# EAGLE board kinesisBLE V1 (EAGLE 9.1.3)
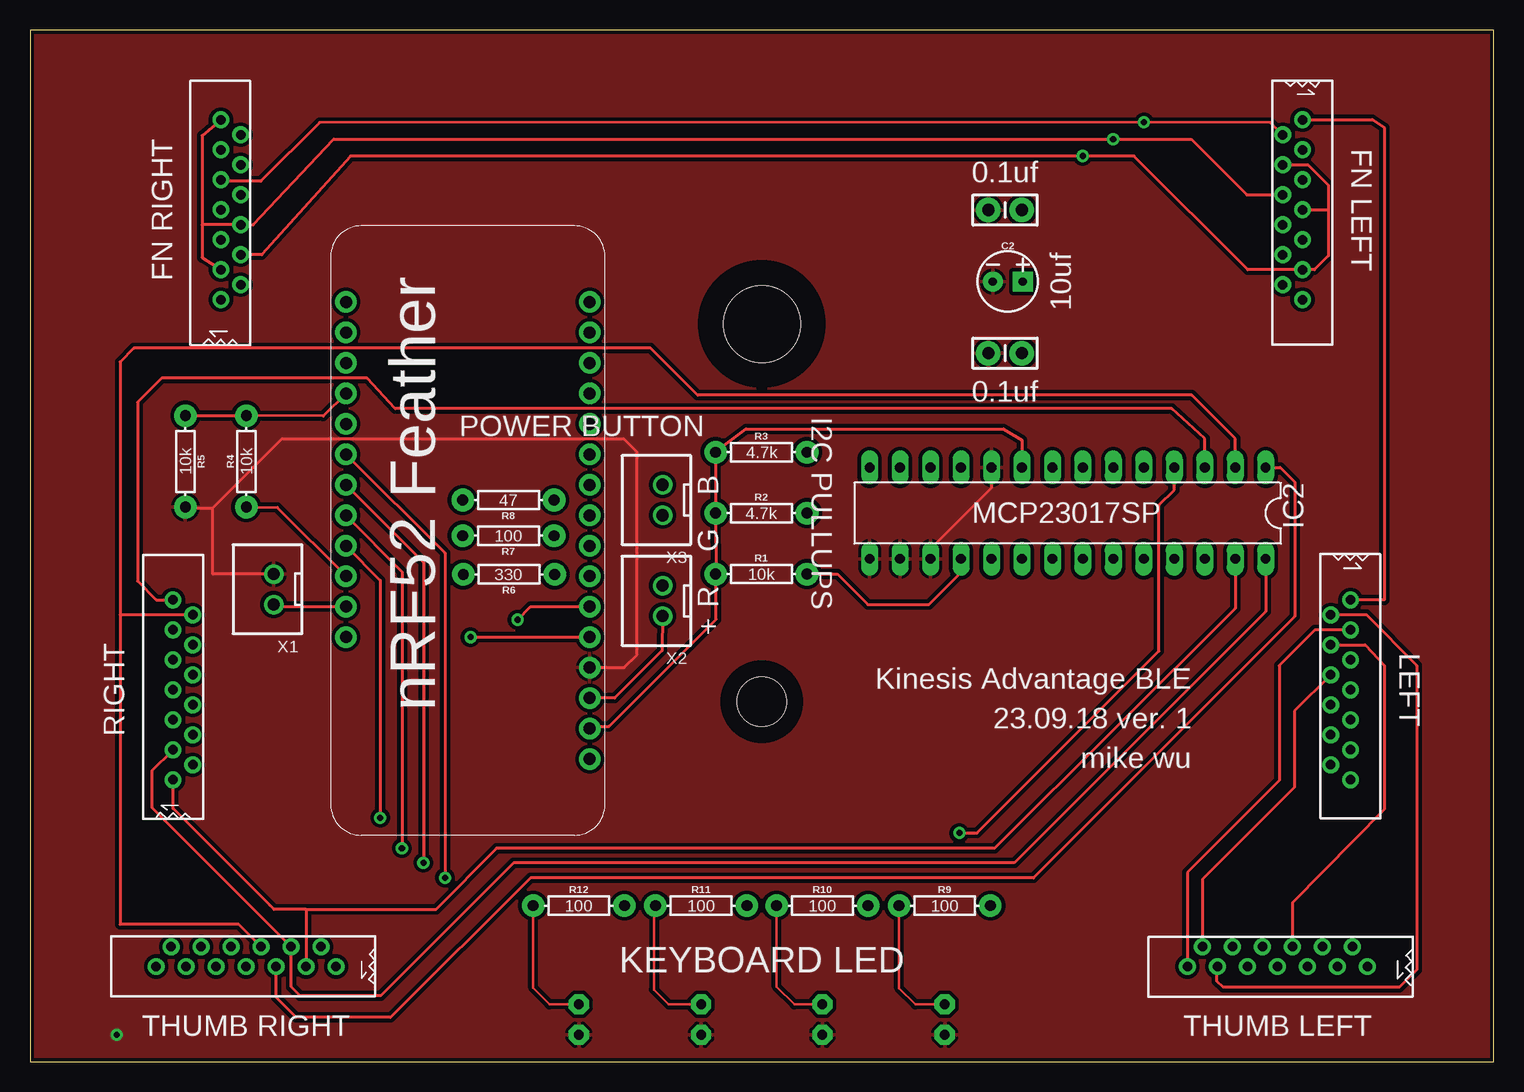
[diagram p0: board, top side]
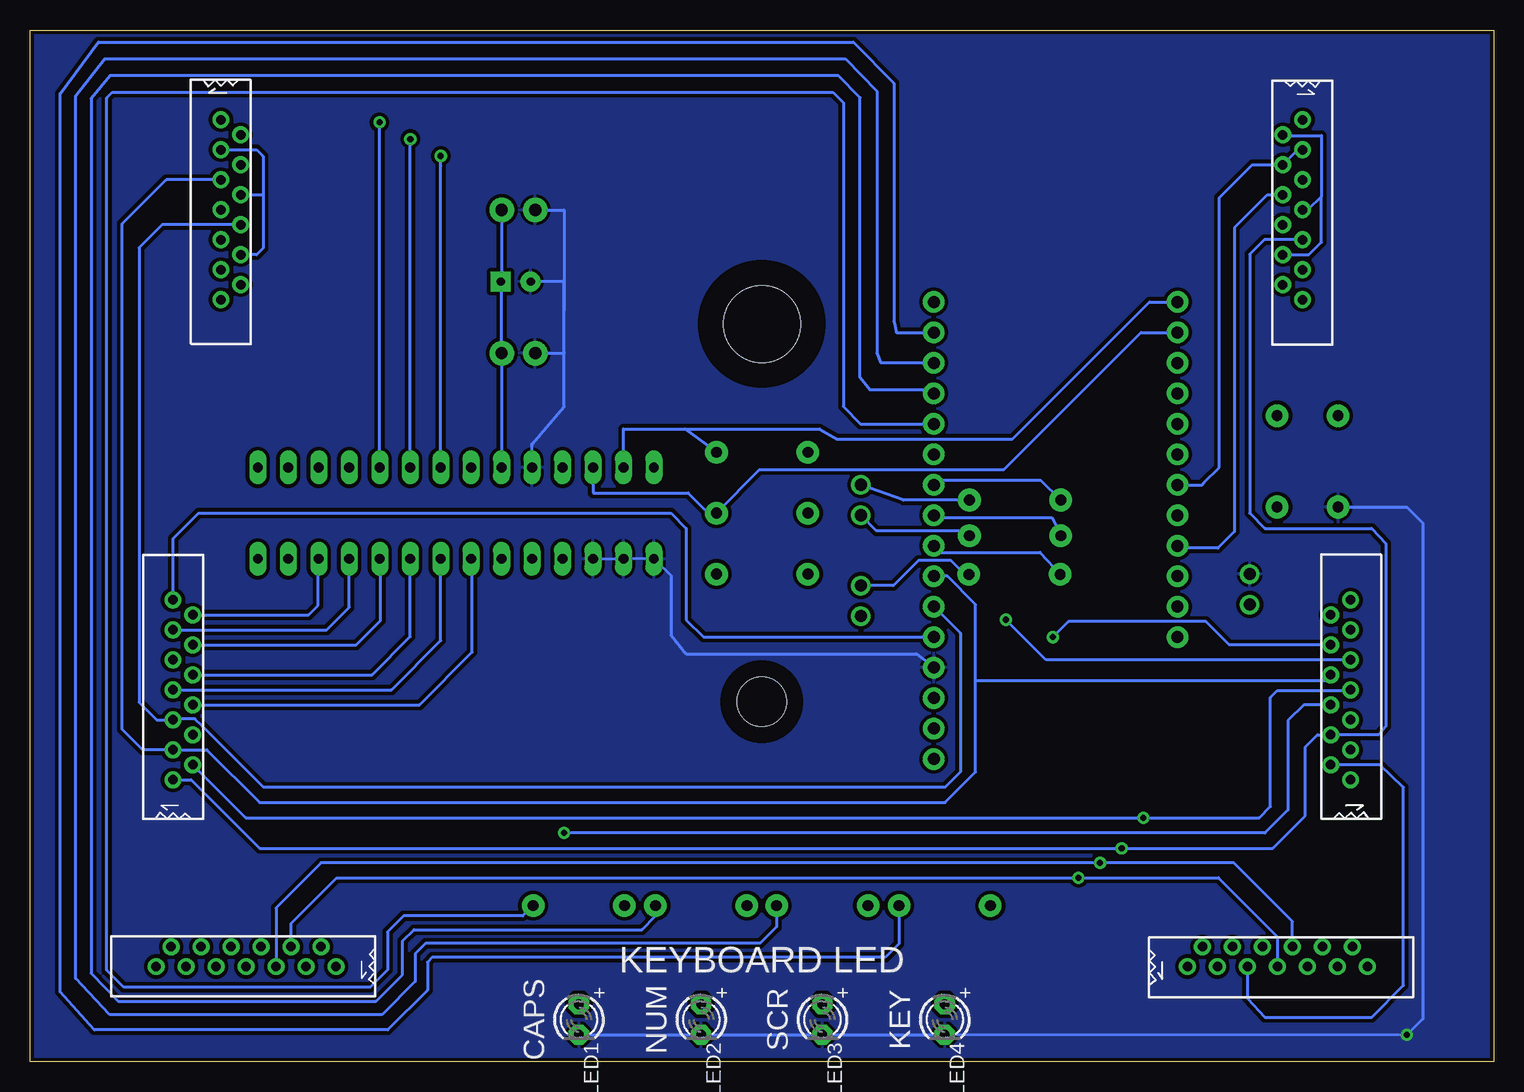
[diagram p1: board, bottom side, seen from below]

Size 122 x 86 mm. Coordinates in mm from the lower left corner, seen from the top.
Outline: 0,0 122,0 122,86 0,86 0,0
Copper layers (1*16): Top 0.035mm / dielectric 1.5mm / Bottom 0.035mm
Design rules "SparkFun": minimum track width 8mil, minimum drill 20mil, track to track 8mil, track to pad 8mil, pad to pad 8mil, via to via 8mil, smd to smd 8mil, copper to edge 10mil, drill to drill 8mil, minimum pad ring 12mil, minimum via ring 10mil, stop-mask expansion 4mil, vias tented up to drill 25mil, thermal gap 10mil
Holes 6.4 mm at 61,61.5
Holes 4.1 mm at 61,30
tKeepout: area 56,56.5 to 66,66.5; area 58.4,27.4 to 63.6,32.6
bKeepout: area 56,56.5 to 66,66.5; area 58.4,27.4 to 63.6,32.6
tRestrict: area 56,56.5 to 66,66.5; area 58.4,27.4 to 63.6,32.6
bRestrict: area 56,56.5 to 66,66.5; area 58.4,27.4 to 63.6,32.6
vRestrict: area 56,56.5 to 66,66.5; area 58.4,27.4 to 63.6,32.6

## Footprints (pad centres in the part's own frame; a part is rotated, then mirrored left to right if it is on the bottom)
CAP-PTH-SMALL-KIT = drill 1.016 pad 2.032: 1 -1.397,0; 2 1.397,0
CPOL-RADIAL-2.5MM-5MM = drill 0.7 pad 1.651 square: 1 1.25,0 | drill 0.7 pad 1.651: 2 -1.25,0
DIL28-3 = drill 0.813 long: 1 -16.51,-3.81; 2 -13.97,-3.81; 3 -11.43,-3.81; 4 -8.89,-3.81; 5 -6.35,-3.81; 6 -3.81,-3.81; 7 -1.27,-3.81; 8 1.27,-3.81; 9 3.81,-3.81; 10 6.35,-3.81; 11 8.89,-3.81; 12 11.43,-3.81; 13 13.97,-3.81; 14 16.51,-3.81; 15 16.51,3.81; 16 13.97,3.81; 17 11.43,3.81; 18 8.89,3.81; 19 6.35,3.81; 20 3.81,3.81; 21 1.27,3.81; 22 -1.27,3.81; 23 -3.81,3.81; 24 -6.35,3.81; 25 -8.89,3.81; 26 -11.43,3.81; 27 -13.97,3.81; 28 -16.51,3.81
LED3MM = drill 0.813 pad 1.676 octagon: A -1.27,0; K 1.27,0
AXIAL-0.3 = drill 0.9 pad 1.88: P$1 -3.81,0; P$2 3.81,0
NRF52FEATHER = drill 1 pad 1.778: 1 -17.78,-10.16; 2 -15.24,-10.16; 3 -12.7,-10.16; 4 -10.16,-10.16; 5 -7.62,-10.16; 6 -5.08,-10.16; 7 -2.54,-10.16; 8 0,-10.16; 9 2.54,-10.16; 10 5.08,-10.16; 11 7.62,-10.16; 12 10.16,-10.16; 13 12.7,-10.16; 14 15.24,-10.16; 15 17.78,-10.16; 16 20.32,-10.16; 17 20.32,10.16; 18 17.78,10.16; 19 15.24,10.16; 20 12.7,10.16; 21 10.16,10.16; 22 7.62,10.16; 23 5.08,10.16; 24 2.54,10.16; 25 0,10.16; 26 -2.54,10.16; 27 -5.08,10.16; 28 -7.62,10.16
TOPLINKS_STAPELBERG = drill 0.8: P$1 -0.08,7.51; P$2 1.57,6.26; P$3 -0.08,5.01; P$4 1.57,3.76; P$5 -0.08,2.51; P$6 1.57,1.26; P$7 -0.08,0.01; P$8 1.57,-1.24; P$9 -0.08,-2.49; P$10 1.57,-3.74; P$11 -0.08,-4.99; P$12 1.57,-6.24; P$13 -0.08,-7.49
JST-XH-02-PACKAGE-ROUND-PAD = drill 1.016: 1 -1.27,0; 2 1.27,0

## Placement (x,y rotation side)
C1  0.1uF  [CAP-PTH-SMALL-KIT]  81.28,59.05 0 top
C2  10uF  [CPOL-RADIAL-2.5MM-5MM]  81.51,65.02 0 top
C3  0.1uF  [CAP-PTH-SMALL-KIT]  81.28,70.99 0 top
IC2  MCP23017SP  [DIL28-3]  86.5,45.72 180 top
LED1  [LED3MM]  76.25,3.5 270 bottom
LED2  [LED3MM]  66.05,3.5 270 bottom
LED3  [LED3MM]  55.95,3.5 270 bottom
LED4  [LED3MM]  45.75,3.5 270 bottom
R1  10k  [AXIAL-0.3]  60.96,40.64 0 top
R2  4.7k  [AXIAL-0.3]  60.96,45.72 0 top
R3  4.7k  [AXIAL-0.3]  60.96,50.8 0 top
R4  10k  [AXIAL-0.3]  18.03,50.04 90 top
R5  10k  [AXIAL-0.3]  12.95,50.04 270 top
R6  330  [AXIAL-0.3]  39.93,40.61 180 top
R7  100  [AXIAL-0.3]  39.88,43.84 180 top
R8  100  [AXIAL-0.3]  39.88,46.81 180 top
R9  330  [AXIAL-0.3]  76.25,13 0 top
R10  330  [AXIAL-0.3]  66.05,13 0 top
R11  330  [AXIAL-0.3]  55.95,13 0 top
R12  330  [AXIAL-0.3]  45.75,13 0 top
U$1  NRF52FEATHER  [NRF52FEATHER]  36.5,43 90 top
U$2  TOPLINKS_STAPELBERG  [TOPLINKS_STAPELBERG]  16,71 0 top
U$3  TOPLINKS_STAPELBERG  [TOPLINKS_STAPELBERG]  106,71 0 bottom
U$4  TOPLINKS_STAPELBERG  [TOPLINKS_STAPELBERG]  12,31 180 bottom
U$5  TOPLINKS_STAPELBERG  [TOPLINKS_STAPELBERG]  110,31 180 top
U$6  TOPLINKS_STAPELBERG  [TOPLINKS_STAPELBERG]  104,8 90 top
U$7  TOPLINKS_STAPELBERG  [TOPLINKS_STAPELBERG]  18,8 90 bottom
X1  JST-XH-02-PIN-ROUND-PAD  [JST-XH-02-PACKAGE-ROUND-PAD]  20.32,39.37 90 top
X2  JST-XH-02-PIN-ROUND-PAD  [JST-XH-02-PACKAGE-ROUND-PAD]  52.73,38.4 90 top
X3  JST-XH-02-PIN-ROUND-PAD  [JST-XH-02-PACKAGE-ROUND-PAD]  52.73,46.81 90 top

## Library data of the parts
C1 C3 = SparkFun-Capacitors; PROD_ID: CAP-08370
C2 = SparkFun-Capacitors; PROD_ID: CAP-08440
IC2 LED1-LED4 = adafruit
R1-R5 = SparkFun-Resistors; PROD_ID: RES-09435
R6 R9-R12 = SparkFun-Resistors; PROD_ID: RES-8371
R7 R8 = SparkFun-Resistors; PROD_ID: RES-12181
U$1 = mike
U$2-U$7 = con-molex-39-53
X1-X3 = Rembrandt Electronics - JST XH Connectors v1-0

## Nets
3V@1: C1.2 C2.1 C3.2 IC2.9 R1.P$1 R2.P$1 R3.P$1 U$1.2
3V@2: U$1.3 X2.1
A6: R4.P$2 R5.P$1 U$1.20
BLUE: R8.P$1 X3.2
CAPS: R12.P$2 U$1.15
COL-A: IC2.21 U$5.P$6
COL-B: IC2.22 U$5.P$7
COL-C: IC2.23 U$5.P$8 U$6.P$2
COL-D: IC2.24 U$5.P$10 U$6.P$8
COL-E: IC2.25 U$5.P$11 U$6.P$1
COL-F: IC2.26 U$5.P$12 U$6.P$3
COL-G: IC2.27 U$4.P$1 U$7.P$3
COL-H: IC2.28 U$4.P$3 U$7.P$4
COL-I: IC2.1 U$4.P$2 U$7.P$5
COL-J: IC2.2 U$4.P$12 U$7.P$6
COL-K: IC2.3 U$4.P$13
COL-L: IC2.4 U$4.P$6
COL-M: IC2.5 U$2.P$5 U$3.P$2
COL-N: IC2.6 U$2.P$1 U$2.P$8 U$2.P$11 U$3.P$3 U$3.P$6 U$3.P$10
COL-O: IC2.7 U$2.P$2 U$2.P$7 U$2.P$10 U$3.P$4 U$3.P$7 U$3.P$11
EN: U$1.27 X1.1
GND: C1.1 C2.2 C3.1 IC2.10 IC2.15 IC2.16 IC2.17 LED1.K LED2.K LED3.K LED4.K R5.P$2 U$1.4 X1.2
GREEN: R7.P$1 X3.1
KEY: R9.P$2 U$1.12
N$1: LED1.A R9.P$1
N$2: U$3.P$13
N$3: U$3.P$12
N$4: IC2.18 R1.P$2
N$5: R4.P$1 U$1.26
N$6: U$3.P$9
N$7: R6.P$2 U$1.8
N$8: R7.P$2 U$1.9
N$9: R8.P$2 U$1.10
N$10: LED2.A R10.P$1
N$11: LED3.A R11.P$1
N$12: LED4.A R12.P$1
N$19: U$5.P$9
N$21: IC2.8
N$24: U$5.P$4
N$39: U$2.P$12
N$40: U$2.P$13
N$44: U$4.P$5
N$50: U$4.P$11
N$54: U$6.P$13
N$55: U$6.P$11
N$56: U$6.P$12
N$57: U$6.P$10
N$58: U$6.P$9
N$60: U$6.P$7
N$61: U$6.P$6
N$67: U$7.P$1
N$68: U$7.P$2
N$75: U$7.P$9
N$76: U$7.P$10
N$77: U$7.P$11
N$78: U$7.P$12
N$79: U$7.P$13
NUM: R11.P$2 U$1.14
RED: R6.P$1 X2.2
ROW-1: U$1.5 U$3.P$1 U$4.P$10 U$5.P$13
ROW-2: U$1.6 U$3.P$8 U$4.P$9 U$5.P$5
ROW-3: U$1.7 U$3.P$5 U$4.P$8 U$5.P$3
ROW-4: U$1.25 U$2.P$6 U$4.P$7 U$5.P$2
ROW-5: U$1.24 U$2.P$9 U$4.P$4 U$5.P$1
ROW-6: U$1.23 U$2.P$3 U$2.P$4 U$6.P$5 U$7.P$8
ROW-7: U$1.22 U$6.P$4 U$7.P$7
SCL: IC2.12 R2.P$2 U$1.18
SCR: R10.P$2 U$1.13
SDA: IC2.13 R3.P$2 U$1.17
VBAT: U$1.28

## Tracks (layer width: path | path; a pad name or v marks a point on that pad's centre or on a via)
3V@1
  Top 0.254: U$1.2 46.84,27.94 48.26,27.94 57.19,36.87 57.19,40.64 | 57.19,40.64 R1.P$1 | 57.19,40.64 R2.P$1 R3.P$1 57.19,50.84 59.69,52.75 81.15,52.75 82.69,51.8 IC2.9
  Bottom 0.245: C3.2 82.68,64.92
  Bottom 0.254: IC2.9 82.69,49.56 C1.2 82.68,64.92 C2.1
3V@2
  Top 0.254: X2.1 52.7,34.27 48.74,30.3 U$1.3
A6
  Top 0.254: U$1.20 24.45,53.81 R4.P$2 R5.P$1
BLUE
  Bottom 0.254: R8.P$1 43.75,46.81 49.19,46.81 X3.2
CAPS
  Bottom 0.254: R12.P$2 49.56,9.82 50.7,8.69 88.47,8.69 88.87,8.29 88.87,5.95 92.18,2.64 116.64,2.64 119.5,5.8 119.5,80.71 116.31,85 53.37,85 50,81.56 50,61.72 49.78,60.78 U$1.15
COL-A
  Bottom 0.254: U$5.P$6 89.54,29.74 85.14,34.14 85.14,41.85 IC2.21
COL-B
  Bottom 0.254: U$5.P$7 91.87,30.99 87.76,35.1 87.76,41.93 IC2.22
COL-C
  Top 0.254: U$5.P$8 105.41,29.22 105.41,22.86 97.74,15.19 U$6.P$2
  Bottom 0.254: U$5.P$8 93.49,32.24 90.31,35.42 IC2.23
COL-D
  Top 0.254: U$5.P$10 111.31,34.74 112.9,33.02 112.9,21.03 105.24,13.24 U$6.P$8
  Bottom 0.254: U$5.P$10 94.8,34.74 92.79,36.75 92.79,41.88 IC2.24
COL-E
  Top 0.254: U$6.P$1 96.49,15.77 104.14,23.42 104.14,33.02 107.11,35.99 U$5.P$11
  Bottom 0.254: IC2.25 95.38,41.93 95.38,37.87 97.26,35.99 U$5.P$11
COL-F
  Top 0.254: U$5.P$12 108.44,37.25 111.41,37.25 115.6,33.01 115.6,7.64 114.15,6.2 99.47,6.2 98.94,6.68 98.94,7.87 U$6.P$3
  Bottom 0.254: U$5.P$12 98.78,37.24 97.98,38.04 97.98,41.89 IC2.26
COL-G
  Top 0.203: U$7.P$3 | 33.83,12.68 33.86,12.7
  Top 0.254: U$4.P$1 11.92,21.1 20.01,13.01 20.34,12.68 23.01,12.68 | IC2.27 100.47,37.78 80.42,17.78 38.89,17.78 33.86,12.7 | 23.01,12.68 U$7.P$3 | 23.01,12.68 33.83,12.68
COL-H
  Top 0.254: U$4.P$3 10.16,24.23 10.16,21.17 U$7.P$4 21.76,6.24 22.51,5.49 29.23,5.49 40.32,16.57 82.05,16.57 103.01,37.53 IC2.28
COL-I
  Top 0.254: IC2.1 104.22,49.53 105.43,48.32 105.43,37.11 83.66,15.31 41.71,15.31 30.05,3.68 22.17,3.68 20.52,5.33 20.52,7.91 U$7.P$5
  Bottom 0.254: U$7.P$5 20.51,5.27 19.05,3.68 10.16,3.68 7.52,6.35 7.52,22.86 9.5,24.74 U$4.P$2
COL-J
  Top 0.254: U$7.P$6 17.4,11.43 7.52,11.43 7.52,37.24 | IC2.2 100.47,51.93 96.85,55.55 55.65,55.55 51.74,59.46 8.66,59.46 7.52,58.32 7.52,37.24 | 7.52,37.24 | U$4.P$12 7.52,37.24 | 7.52,37.24
COL-K
  Top 0.254: IC2.3 97.93,51.93 95.17,54.43 30.45,54.43 28.12,56.97 10.97,56.97 8.97,54.97 8.97,40.06 10.53,38.49 U$4.P$13
COL-L  (via drill 0.51)
  Top 0.254: IC2.4 95.39,47.66 94.11,46.38 94.11,34.21 78.95,19.05 v77.47,19.05
  Bottom 0.254: U$4.P$6 15.81,29.74 17.13,28.42 17.13,20.97 19.05,19.05 v77.47,19.05
COL-M  (via drill 0.51)
  Top 0.254: U$2.P$5 16.04,73.39 19.24,73.39 24.14,78.28 v92.86,78.3 103.41,78.28 U$3.P$2
  Bottom 0.254: IC2.5 92.85,78.27 v92.86,78.3
COL-N  (via drill 0.51)
  Top 0.254: U$2.P$1 14.35,77.2 14.35,69.76 | 14.35,69.76 14.35,67.04 U$2.P$11 | 14.35,69.76 U$2.P$8 18.61,69.76 25.31,76.9 v90.29,76.9 90.27,76.88 96.8,76.89 101.43,72.26 U$3.P$6
  Bottom 0.254: U$3.P$3 103.11,76.01 102.57,75.47 102.57,72.25 104.42,72.25 U$3.P$6 102.57,72.26 102.57,67.8 103.11,67.26 U$3.P$10 | IC2.6 90.31,76.38 v90.29,76.9
COL-O  (via drill 0.51)
  Top 0.254: U$3.P$4 106.54,74.76 108.25,73.05 108.25,71.04 | 108.25,71.04 108.25,67.18 107.08,66.01 U$3.P$11 101.52,66.01 92.03,75.5 v87.76,75.5 26.73,75.5 19.32,67.26 U$2.P$10 | U$3.P$7 108.21,71.01 108.25,71.04
  Bottom 0.254: U$2.P$2 17.51,77.2 14.35,77.2 14.35,72.12 | 14.35,72.12 15.46,71.01 U$2.P$7 | U$2.P$10 15.4,67.26 14.35,68.31 14.35,72.12 | IC2.7 87.77,74.65 87.79,74.67 87.77,75.48 v87.76,75.5
EN
  Top 0.254: X1.1 20.5,37.92 U$1.27
GND  (via drill 0.51)
  Top 0.254: IC2.10 80.15,47.82 75.06,42.72 75.06,41.95 IC2.17 | 15.21,46.14 13.05,46.14 R5.P$2 | 15.21,46.14 20.96,51.89 49.53,51.89 50.6,50.83 50.6,33.91 49.53,32.84 U$1.4 | X1.2 15.24,40.64 15.21,40.67 15.21,46.14
  Bottom 0.203: LED4.K v7.22,2.23
  Bottom 0.245: C3.1 77.5,70.99 77.48,70.98 77.48,62.62 77.47,62.61
  Bottom 0.254: 72.39,41.94 IC2.15 68.58,40.53 68.58,35.56 67.31,34 48.11,34 U$1.4 | 72.39,41.94 IC2.16 | IC2.17 72.39,41.94 | IC2.10 80.16,51.49 77.47,54.61 77.47,59.08 | 77.47,59.08 77.47,62.61 77.47,65.02 C2.2 | C1.1 77.47,59.08 | R5.P$2 7.23,46.23 5.89,44.89 5.89,3.56 v7.22,2.23 | LED1.K LED2.K LED3.K LED4.K
  pour Top (isolate 0.305): 0,86 122,86 122,0 121.92,0 0,0
  pour Bottom (isolate 0.305): 0,86 122,86 122,0 0,0
GREEN
  Bottom 0.254: R7.P$1 44.19,44.24 51.43,44.24 X3.1
KEY
  Bottom 0.254: U$1.12 52.78,53.16 54.2,54.61 54.2,79.96 55.07,80.8 115.14,80.8 115.6,80.33 115.6,7.62 114.19,6.2 93.64,6.2 92.2,7.64 92.2,10.8 90.87,12.13 80.93,12.13 R9.P$2
N$1
  Top 0.203: LED1.A 73.79,4.77 72.44,6.12 R9.P$1
N$4
  Top 0.254: R1.P$2 64.92,40.64 67.31,40.64 69.85,38.1 74.93,38.1 77.61,40.78 IC2.18
N$5
  Top 0.254: R4.P$1 20.61,46.19 U$1.26
N$7
  Bottom 0.254: R6.P$2 37.79,42.44 46.1,42.44 U$1.8
N$8
  Bottom 0.254: R7.P$2 36.83,45.34 46.46,45.34 U$1.9
N$9
  Bottom 0.254: R8.P$2 37.77,48.46 45.14,48.46 45.14,48.47 46.27,48.47 U$1.10
N$10
  Top 0.203: LED2.A 63.71,4.77 62.24,6.24 R10.P$1
N$11
  Top 0.203: R11.P$1 52,12.86 52,6 53.23,4.77 LED3.A
N$12
  Top 0.203: LED4.A 43.31,4.77 41.94,6.14 R12.P$1
NUM
  Bottom 0.254: R11.P$2 59.76,11.23 59.79,11.2 59.8,11.2 61.14,9.86 89.01,9.86 89.89,8.98 89.89,6.68 92.66,3.91 115.34,3.91 118.2,6.93 118.2,80.5 115.78,83.6 54.04,83.6 51.4,80.91 51.4,59.06 51.09,58.28 46.7,58.28 U$1.14
RED
  Bottom 0.254: R6.P$1 44.07,40.62 45.22,41.76 47.95,41.76 50.03,39.67 X2.2
ROW-1  (via drill 0.51)
  Top 0.254: U$5.P$13 112.9,38.49 112.9,77.84 111.88,78.53 106.1,78.53 U$3.P$1 | v36.73,35.38 U$1.5
  Bottom 0.254: U$5.P$13 110.08,43.59 107.95,45.72 68.58,45.72 67.31,44.45 67.31,36.83 65.86,35.4 U$1.5 | U$4.P$10 22.04,34.74 23.98,36.68 35.43,36.68 v36.73,35.38
ROW-2  (via drill 0.51)
  Top 0.254: v40.64,36.83 41.73,37.92 U$1.6
  Bottom 0.254: 110.49,28.49 111.44,28.49 112.9,29.96 112.9,67.84 110.99,69.76 U$3.P$8 | 110.49,28.49 U$5.P$5 | U$1.6 44.45,35.71 44.45,24.13 45.72,22.86 102.54,22.86 107.62,27.94 107.62,27.93 108.26,28.57 110.41,28.57 110.49,28.49 | U$4.P$9 37.3,33.49 v40.64,36.83
ROW-3
  Bottom 0.254: U$3.P$5 110.64,73.51 114.3,69.85 114.3,27.67 112.62,25.99 | 112.62,25.99 U$5.P$3 107.27,25.99 102.87,21.59 45.72,21.59 43.18,24.13 43.18,31.75 | 112.62,25.99 | 43.18,31.75 43.18,38.1 45.54,40.46 U$1.7 | U$4.P$8 14.06,31.75 43.18,31.75
ROW-4  (via drill 0.51)
  Top 0.254: U$1.25 29.2,40.1 v29.2,20.32
  Bottom 0.254: U$2.P$6 18.84,72.26 21.59,69.51 21.59,44.17 22.96,42.8 22.96,42.82 26.16,42.82 U$1.25 | U$5.P$2 104.01,20.32 v29.2,20.32 19.53,20.32 18.59,21.26 18.59,30.35 18,30.94 11.97,30.94 U$4.P$7
ROW-5  (via drill 0.51)
  Top 0.254: U$1.24 31,40.82 v31,17.78
  Bottom 0.254: U$2.P$9 19.12,68.51 20.32,67.31 20.32,45.72 19.05,44.45 10.16,44.45 8.97,43.18 8.97,27.94 9.59,27.24 U$4.P$4 14.67,27.24 15.7,26.21 15.7,20.5 18.41,17.78 v31,17.78 102.87,17.78 108.58,23.49 U$5.P$1
ROW-6  (via drill 0.51)
  Top 0.203: 32.82,16.59 v32.8,16.57
  Top 0.254: U$1.23 32.82,41.6 32.82,16.59
  Bottom 0.254: U$7.P$8 16.76,11.68 21.64,16.56 v32.8,16.57 97.74,16.57 101.5,12.8 U$6.P$5 | U$1.23 24.31,48.08 24.13,48.26 22.86,49.53 22.86,72.01 20.11,74.76 U$2.P$4 16.32,76.01 U$2.P$3
ROW-7  (via drill 0.51)
  Top 0.254: U$1.22 34.6,42.39 v34.6,15.32
  Bottom 0.254: U$6.P$4 100.24,11.52 96.44,15.31 v34.6,15.32 22.94,15.32 18.01,10.39 U$7.P$7
SCL
  Bottom 0.254: IC2.12 75.07,49.1 75.06,49.09 75.06,47.4 67.14,47.4 65.5,45.75 R2.P$2 61.21,49.35 40.82,49.35 29.39,60.78 U$1.18
SCR
  Bottom 0.254: U$1.13 46.96,56 52,56 52.8,57.02 52.8,80.36 54.61,82.2 115.32,82.2 116.9,80.27 116.9,7.37 114.65,5.03 93.15,5.03 90.94,7.25 90.94,10.06 90,11 71,11 69.86,12.14 R10.P$2
SDA
  Bottom 0.254: 67.4,52.75 72.53,52.75 IC2.13 | 67.4,52.75 R3.P$2 | 67.4,52.75 56.17,52.75 54.74,51.91 40.09,51.91 28.68,63.32 U$1.17

## Text on the board
tPlace: 0.1uf | FN RIGHT | FN LEFT | 10uf | 0.1uf | POWER BUTTON | 4.7k | 10k | 10k | 47 | B | 4.7k | I2C PULLUPS | MCP23017SP | 100 | G | 330 | 10k | R | + | RIGHT | Kinesis Advantage BLE | LEFT | nRF52 Feather | 23.09.18 ver. 1 | mike wu | 100 | 100 | 100 | 100 | KEYBOARD LED | THUMB RIGHT | THUMB LEFT
bPlace: KEYBOARD LED | KEY | SCR | NUM | CAPS